# EAGLE board OpenSnake-Panel (EAGLE 9.6.2)
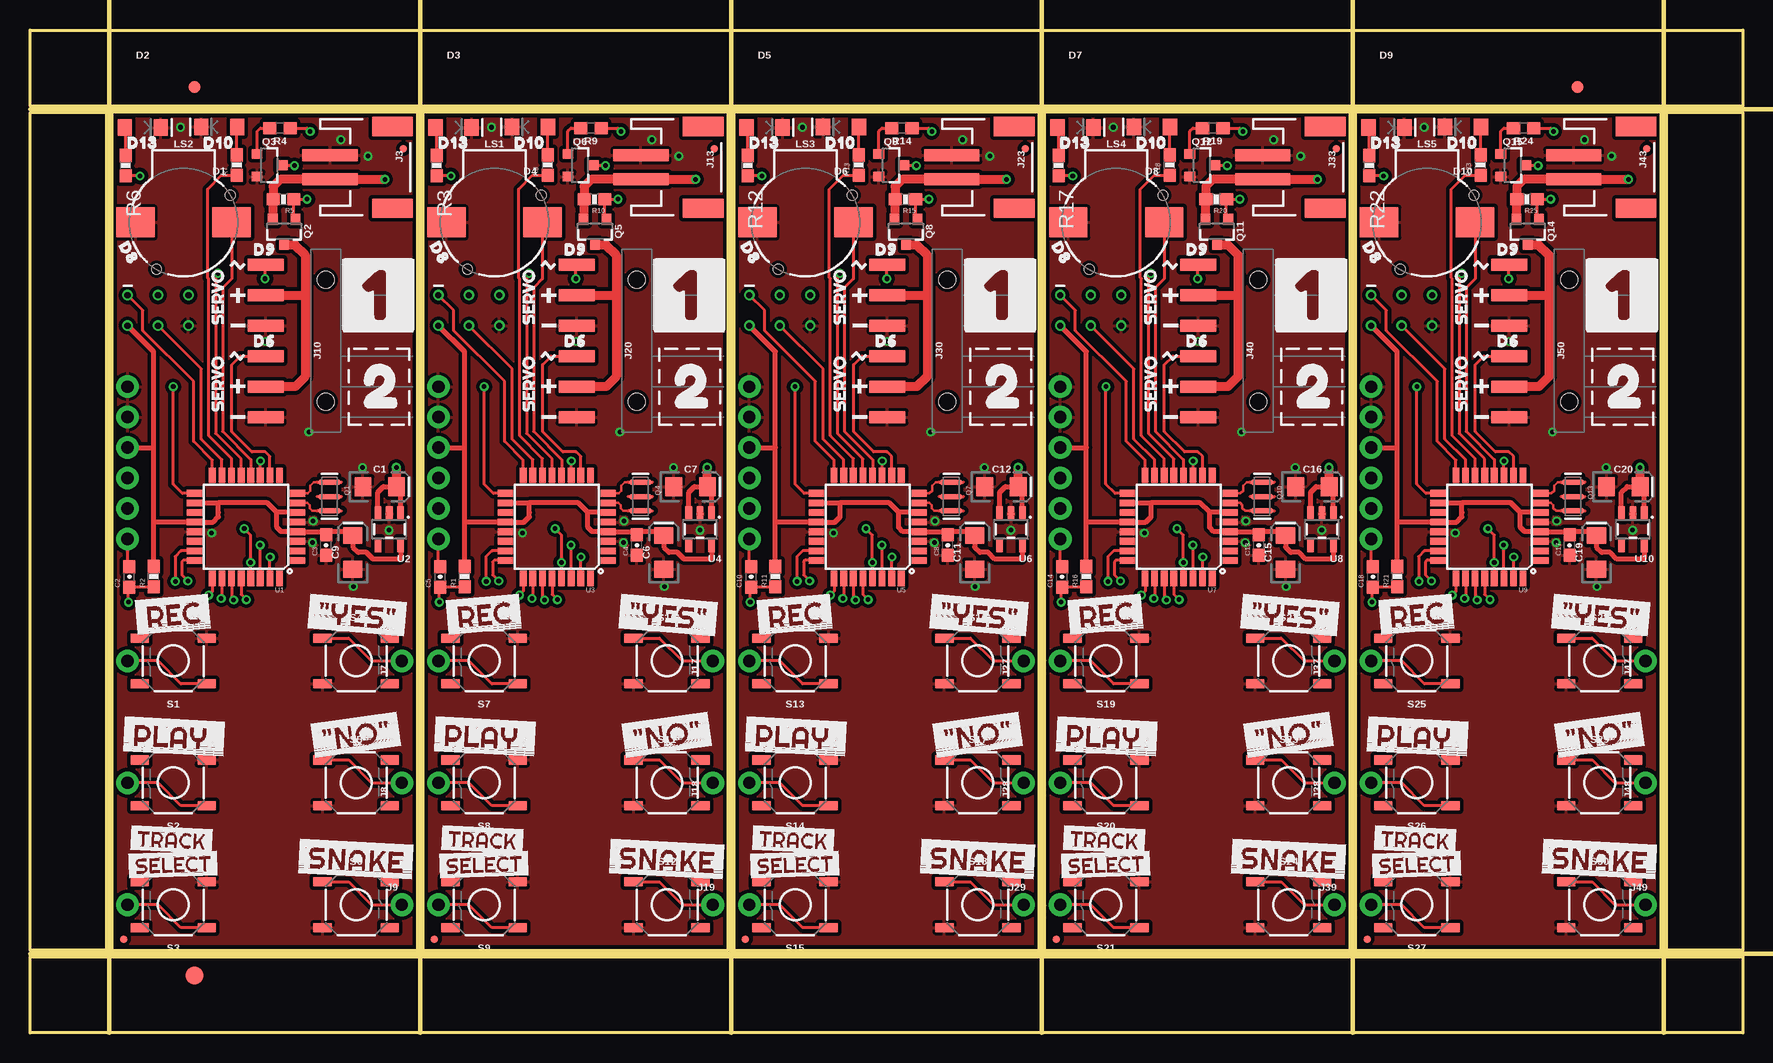
[diagram p0: board, top side]
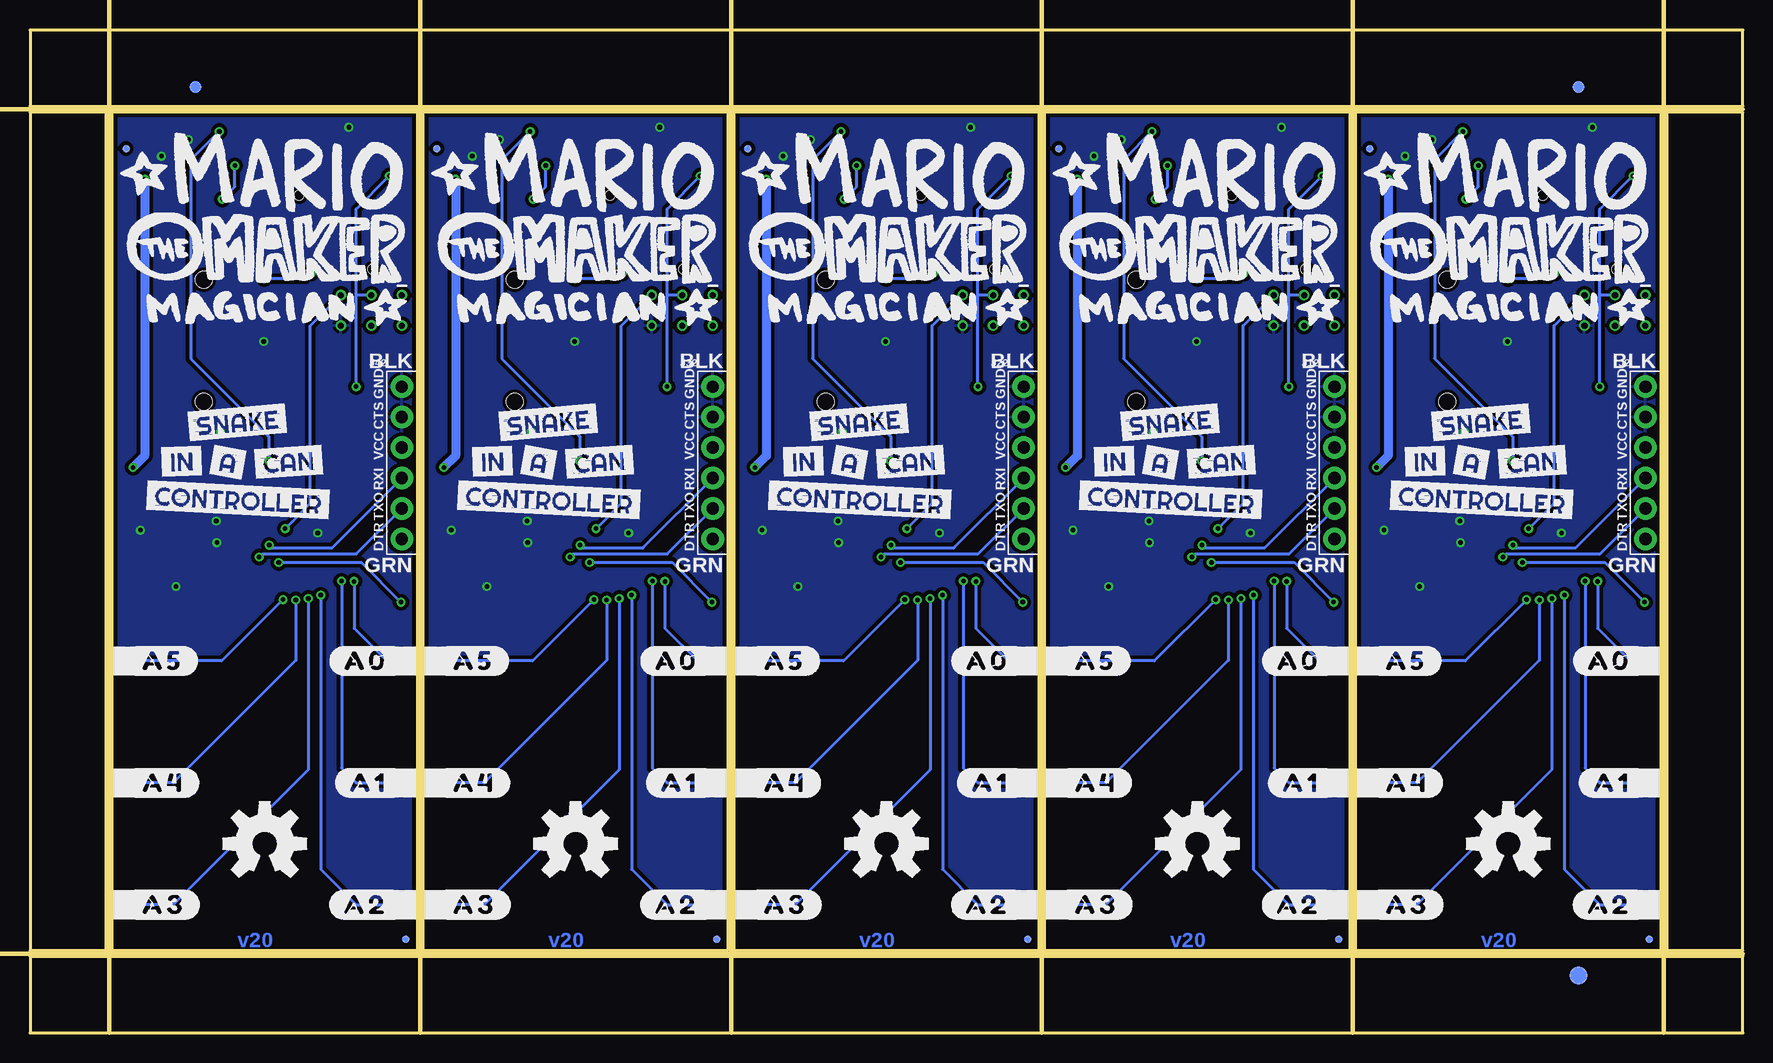
[diagram p1: board, bottom side, seen from below]

Size 142.75 x 83.57 mm. Coordinates in mm from the lower left corner, seen from the top.
Outline: 6.86,6.86 6.86,76.71 32.26,76.71 32.26,6.86 6.86,6.86
Outline: 32.77,6.86 32.77,76.71 58.17,76.71 58.17,6.86 32.77,6.86
Outline: 58.67,6.86 58.67,76.71 84.07,76.71 84.07,6.86 58.67,6.86
Outline: 84.58,6.86 84.58,76.71 109.98,76.71 109.98,6.86 84.58,6.86
Outline: 110.49,6.86 110.49,76.71 135.89,76.71 135.89,6.86 110.49,6.86
Outline: 0,6.35 142.75,6.35 142.75,0 0,0 0,6.35
Outline: 136.4,76.71 142.75,76.71 142.75,6.86 136.4,6.86 136.4,76.71
Outline: 0,83.57 142.75,83.57 142.75,77.22 0,77.22 0,83.57
Outline: 0,76.71 6.35,76.71 6.35,6.86 0,6.86 0,76.71
Copper layers (1*16): Top 0.035mm / dielectric 1.5mm / Bottom 0.035mm
Design rules "OpenSnake": minimum track width 7mil, minimum drill 15mil, track to track 7mil, track to pad 7mil, pad to pad 7mil, via to via 7mil, smd to smd 7mil, copper to edge 7mil, drill to drill 7mil, minimum pad ring 7mil, minimum via ring 7mil, stop-mask expansion 4mil, vias tented up to drill 25mil, thermal gap 10mil
Net classes: 1 vcc: width 0.203 mm
Milling: 8 lines

## Footprints (pad centres in the part's own frame; a part is rotated, then mirrored left to right if it is on the bottom)
EIA3216 = smd 1.4 x 1.6: + 1.4,0; - -1.4,0
0603-CAP = smd 1.1 x 1: 1 -0.85,0; 2 0.85,0
LED-1206 = smd 1.2 x 1.4: A -1.5,0; C 1.5,0
FIDUCIAL-1X2 = smd 1 x 1: 1 0,0
FIDUCIAL-1.5X3 = smd 1.5 x 1.5: 1 0,0
FIDUCIAL-MICRO = smd 0.635 x 0.635: 1 0,0
6_PIN_SERIAL_TARGET_SIDE_W_SILK = drill 1.016 pad 1.88: P$1 -6.35,0; P$2 -3.81,0; P$3 -1.27,0; P$4 1.27,0; P$5 3.81,0; P$6 6.35,0
2X3_TEST_POINTS = drill 0.508: 1 -2.54,-1.27; 2 -2.54,1.27; 3 0,-1.27; 4 0,1.27; 5 2.54,-1.27; 6 2.54,1.27
JST-2-SMD = smd 1 x 4.6: 1 -1,-3.7; 2 1,-3.7 | smd 1.6 x 3.4: NC1 -3.4,1.5; NC2 3.4,1.5
1X01_NO_SILK = drill 1.016 pad 1.88: 1 0,0
1X06-SMD_RA_MALE = smd 1 x 3: 1 -6.35,5; 2 -3.81,5; 3 -1.27,5; 4 1.27,5; 5 3.81,5; 6 6.35,5 | hole 1.4: -5.08,0; 5.08,0
BUZZER-CCV = smd 3.2 x 2.5: + 4,0; - -4,0 | hole 0.8: -3.9,-2.25; 2.25,3.9
RESONATOR-SMD = smd 0.45 x 1.905: 1 -1.2,0; 2 0,0; 3 1.2,0
SOT23-3 = smd 0.8 x 0.9: 1 -0.95,-1; 2 0.95,-1; 3 0,1.1
0603-RES = smd 1.1 x 1: 1 -0.85,0; 2 0.85,0
0603 = smd 1.1 x 1: 1 -0.85,0; 2 0.85,0
TACTILE_SWITCH_SMD_5.2MM = smd 1.524 x 0.762: 1 -2.794,1.905; 2 2.794,1.905; 3 -2.794,-1.905; 4 2.794,-1.905
TQFP32-08 = smd 1.27 x 0.559: 1 -4.293,2.8; 2 -4.293,2; 3 -4.293,1.2; 4 -4.293,0.4; 5 -4.293,-0.4; 6 -4.293,-1.2; 7 -4.293,-2; 8 -4.293,-2.8; 17 4.293,-2.8; 18 4.293,-2; 19 4.293,-1.2; 20 4.293,-0.4; 21 4.293,0.4; 22 4.293,1.2; 23 4.293,2; 24 4.293,2.8 | smd 0.559 x 1.27: 9 -2.8,-4.293; 10 -2,-4.293; 11 -1.2,-4.293; 12 -0.4,-4.293; 13 0.4,-4.293; 14 1.2,-4.293; 15 2,-4.293; 16 2.8,-4.293; 25 2.8,4.293; 26 2,4.293; 27 1.2,4.293; 28 0.4,4.293; 29 -0.4,4.293; 30 -1.2,4.293; 31 -2,4.293; 32 -2.8,4.293
SOT23-5 = smd 0.55 x 1.2: 1 -0.95,-1.3; 2 0,-1.3; 3 0.95,-1.3; 4 0.95,1.3; 5 -0.95,1.3

## Placement (x,y rotation side)
C1  10uF  [EIA3216]  29.15,45.51 0 top
C2  0.1uF  [0603-CAP]  8.28,37.99 90 top
C3  0.1uF  [0603-CAP]  24.67,40.65 90 top
C4  0.1uF  [0603-CAP]  50.58,40.65 90 top
C5  0.1uF  [0603-CAP]  34.19,37.99 90 top
C6  10uF  [EIA3216]  52.81,40.04 90 top
C7  10uF  [EIA3216]  55.05,45.51 0 top
C8  0.1uF  [0603-CAP]  76.49,40.65 90 top
C9  10uF  [EIA3216]  26.91,40.04 90 top
C10  0.1uF  [0603-CAP]  60.1,37.99 90 top
C11  10uF  [EIA3216]  78.72,40.04 90 top
C12  10uF  [EIA3216]  80.96,45.51 0 top
C13  0.1uF  [0603-CAP]  102.39,40.65 90 top
C14  0.1uF  [0603-CAP]  86.01,37.99 90 top
C15  10uF  [EIA3216]  104.63,40.04 90 top
C16  10uF  [EIA3216]  106.87,45.51 0 top
C17  0.1uF  [0603-CAP]  128.3,40.65 90 top
C18  0.1uF  [0603-CAP]  111.91,37.99 90 top
C19  10uF  [EIA3216]  130.54,40.04 90 top
C20  10uF  [EIA3216]  132.78,45.51 0 top
D1  GREEN  [LED-1206]  15.77,75.49 180 top
D2  RED  [LED-1206]  9.4,75.44 0 top
D3  RED  [LED-1206]  35.31,75.44 0 top
D4  GREEN  [LED-1206]  41.68,75.49 180 top
D5  RED  [LED-1206]  61.21,75.44 0 top
D6  GREEN  [LED-1206]  67.59,75.49 180 top
D7  RED  [LED-1206]  87.12,75.44 0 top
D8  GREEN  [LED-1206]  93.5,75.49 180 top
D9  RED  [LED-1206]  113.03,75.44 0 top
D10  GREEN  [LED-1206]  119.41,75.49 180 top
E$1  [FIDUCIAL-1X2]  13.72,78.8 0 top
E$2  [FIDUCIAL-1X2]  13.72,78.8 0 bottom
E$3  [FIDUCIAL-1X2]  128.97,78.8 0 top
E$4  [FIDUCIAL-1X2]  128.97,78.8 0 bottom
E$5  [FIDUCIAL-1.5X3]  13.72,4.76 0 top
E$6  [FIDUCIAL-1.5X3]  13.72,4.76 0 bottom
FD1  FIDUCIALUFIDUCIAL  [FIDUCIAL-MICRO]  31.12,73.69 0 top
FD2  FIDUCIALUFIDUCIAL  [FIDUCIAL-MICRO]  31.12,73.69 0 bottom
FD3  FIDUCIALUFIDUCIAL  [FIDUCIAL-MICRO]  7.8,7.8 0 top
FD4  FIDUCIALUFIDUCIAL  [FIDUCIAL-MICRO]  7.8,7.8 0 bottom
FD5  FIDUCIALUFIDUCIAL  [FIDUCIAL-MICRO]  57.02,73.69 0 top
FD6  FIDUCIALUFIDUCIAL  [FIDUCIAL-MICRO]  57.02,73.69 0 bottom
FD7  FIDUCIALUFIDUCIAL  [FIDUCIAL-MICRO]  33.71,7.8 0 top
FD8  FIDUCIALUFIDUCIAL  [FIDUCIAL-MICRO]  33.71,7.8 0 bottom
FD9  FIDUCIALUFIDUCIAL  [FIDUCIAL-MICRO]  82.93,73.69 0 top
FD10  FIDUCIALUFIDUCIAL  [FIDUCIAL-MICRO]  82.93,73.69 0 bottom
FD11  FIDUCIALUFIDUCIAL  [FIDUCIAL-MICRO]  59.61,7.8 0 top
FD12  FIDUCIALUFIDUCIAL  [FIDUCIAL-MICRO]  59.61,7.8 0 bottom
FD13  FIDUCIALUFIDUCIAL  [FIDUCIAL-MICRO]  108.84,73.69 0 top
FD14  FIDUCIALUFIDUCIAL  [FIDUCIAL-MICRO]  108.84,73.69 0 bottom
FD15  FIDUCIALUFIDUCIAL  [FIDUCIAL-MICRO]  85.52,7.8 0 top
FD16  FIDUCIALUFIDUCIAL  [FIDUCIAL-MICRO]  85.52,7.8 0 bottom
FD17  FIDUCIALUFIDUCIAL  [FIDUCIAL-MICRO]  134.75,73.69 0 top
FD18  FIDUCIALUFIDUCIAL  [FIDUCIAL-MICRO]  134.75,73.69 0 bottom
FD19  FIDUCIALUFIDUCIAL  [FIDUCIAL-MICRO]  111.43,7.8 0 top
FD20  FIDUCIALUFIDUCIAL  [FIDUCIAL-MICRO]  111.43,7.8 0 bottom
J1  [6_PIN_SERIAL_TARGET_SIDE_W_SILK]  8.13,47.5 90 bottom
J2  SPI  [2X3_TEST_POINTS]  10.67,60.2 180 bottom
J3  [JST-2-SMD]  28.7,72.12 270 top
J4  [1X01_NO_SILK]  8.13,30.99 90 top
J5  [1X01_NO_SILK]  8.13,20.83 90 top
J6  [1X01_NO_SILK]  8.13,10.67 90 top
J7  [1X01_NO_SILK]  30.99,30.99 90 top
J8  [1X01_NO_SILK]  30.99,20.83 90 top
J9  [1X01_NO_SILK]  30.99,10.67 0 top
J10  RA 6Pin SMD  [1X06-SMD_RA_MALE]  24.64,57.66 90 top
J11  [6_PIN_SERIAL_TARGET_SIDE_W_SILK]  34.04,47.5 90 bottom
J12  SPI  [2X3_TEST_POINTS]  36.58,60.2 180 bottom
J13  [JST-2-SMD]  54.61,72.12 270 top
J14  [1X01_NO_SILK]  34.04,30.99 90 top
J15  [1X01_NO_SILK]  34.04,20.83 90 top
J16  [1X01_NO_SILK]  34.04,10.67 90 top
J17  [1X01_NO_SILK]  56.9,30.99 90 top
J18  [1X01_NO_SILK]  56.9,20.83 90 top
J19  [1X01_NO_SILK]  56.9,10.67 0 top
J20  RA 6Pin SMD  [1X06-SMD_RA_MALE]  50.55,57.66 90 top
J21  [6_PIN_SERIAL_TARGET_SIDE_W_SILK]  59.94,47.5 90 bottom
J22  SPI  [2X3_TEST_POINTS]  62.48,60.2 180 bottom
J23  [JST-2-SMD]  80.52,72.12 270 top
J24  [1X01_NO_SILK]  59.94,30.99 90 top
J25  [1X01_NO_SILK]  59.94,20.83 90 top
J26  [1X01_NO_SILK]  59.94,10.67 90 top
J27  [1X01_NO_SILK]  82.8,30.99 90 top
J28  [1X01_NO_SILK]  82.8,20.83 90 top
J29  [1X01_NO_SILK]  82.8,10.67 0 top
J30  RA 6Pin SMD  [1X06-SMD_RA_MALE]  76.45,57.66 90 top
J31  [6_PIN_SERIAL_TARGET_SIDE_W_SILK]  85.85,47.5 90 bottom
J32  SPI  [2X3_TEST_POINTS]  88.39,60.2 180 bottom
J33  [JST-2-SMD]  106.43,72.12 270 top
J34  [1X01_NO_SILK]  85.85,30.99 90 top
J35  [1X01_NO_SILK]  85.85,20.83 90 top
J36  [1X01_NO_SILK]  85.85,10.67 90 top
J37  [1X01_NO_SILK]  108.71,30.99 90 top
J38  [1X01_NO_SILK]  108.71,20.83 90 top
J39  [1X01_NO_SILK]  108.71,10.67 0 top
J40  RA 6Pin SMD  [1X06-SMD_RA_MALE]  102.36,57.66 90 top
J41  [6_PIN_SERIAL_TARGET_SIDE_W_SILK]  111.76,47.5 90 bottom
J42  SPI  [2X3_TEST_POINTS]  114.3,60.2 180 bottom
J43  [JST-2-SMD]  132.33,72.12 270 top
J44  [1X01_NO_SILK]  111.76,30.99 90 top
J45  [1X01_NO_SILK]  111.76,20.83 90 top
J46  [1X01_NO_SILK]  111.76,10.67 90 top
J47  [1X01_NO_SILK]  134.62,30.99 90 top
J48  [1X01_NO_SILK]  134.62,20.83 90 top
J49  [1X01_NO_SILK]  134.62,10.67 0 top
J50  RA 6Pin SMD  [1X06-SMD_RA_MALE]  128.27,57.66 90 top
LOGO1  OSHW-LOGOL  [OSHW-LOGO-L]  19.56,15.75 0 bottom
LOGO2  OSHW-LOGOL  [OSHW-LOGO-L]  45.47,15.75 0 bottom
LOGO3  OSHW-LOGOL  [OSHW-LOGO-L]  71.37,15.75 0 bottom
LOGO4  OSHW-LOGOL  [OSHW-LOGO-L]  97.28,15.75 0 bottom
LOGO5  OSHW-LOGOL  [OSHW-LOGO-L]  123.19,15.75 0 bottom
LS1  BUZZER  [BUZZER-CCV]  38.7,67.54 180 top
LS2  BUZZER  [BUZZER-CCV]  12.79,67.54 180 top
LS3  BUZZER  [BUZZER-CCV]  64.61,67.54 180 top
LS4  BUZZER  [BUZZER-CCV]  90.52,67.54 180 top
LS5  BUZZER  [BUZZER-CCV]  116.43,67.54 180 top
Q1  16MHZ  [RESONATOR-SMD]  24.95,44.69 270 top
Q2  20V/4.2A/52mΩ/1.4W  [SOT23-3]  21.18,66.78 180 top
Q3  600mA/40V  [SOT23-3]  19.92,72.29 270 top
Q4  16MHZ  [RESONATOR-SMD]  50.86,44.69 270 top
Q5  20V/4.2A/52mΩ/1.4W  [SOT23-3]  47.09,66.78 180 top
Q6  600mA/40V  [SOT23-3]  45.83,72.29 270 top
Q7  16MHZ  [RESONATOR-SMD]  76.77,44.69 270 top
Q8  20V/4.2A/52mΩ/1.4W  [SOT23-3]  73,66.78 180 top
Q9  600mA/40V  [SOT23-3]  71.74,72.29 270 top
Q10  16MHZ  [RESONATOR-SMD]  102.68,44.69 270 top
Q11  20V/4.2A/52mΩ/1.4W  [SOT23-3]  98.91,66.78 180 top
Q12  600mA/40V  [SOT23-3]  97.65,72.29 270 top
Q13  16MHZ  [RESONATOR-SMD]  128.58,44.69 270 top
Q14  20V/4.2A/52mΩ/1.4W  [SOT23-3]  124.81,66.78 180 top
Q15  600mA/40V  [SOT23-3]  123.56,72.29 270 top
R1  10K  [0603-RES]  36.21,38.01 90 top
R2  10K  [0603-RES]  10.3,38.01 90 top
R3  330  [0603-RES]  33.89,72.26 90 top
R4  100  [0603]  20.84,75.38 180 top
R5  10K  [0603-RES]  21.13,69.45 180 top
R6  330  [0603-RES]  7.99,72.26 90 top
R7  330  [0603-RES]  17.25,72.3 90 top
R8  330  [0603-RES]  43.15,72.3 90 top
R9  100  [0603]  46.74,75.38 180 top
R10  10K  [0603-RES]  47.04,69.45 180 top
R11  10K  [0603-RES]  62.12,38.01 90 top
R12  330  [0603-RES]  59.8,72.26 90 top
R13  330  [0603-RES]  69.06,72.3 90 top
R14  100  [0603]  72.65,75.38 180 top
R15  10K  [0603-RES]  72.95,69.45 180 top
R16  10K  [0603-RES]  88.03,38.01 90 top
R17  330  [0603-RES]  85.71,72.26 90 top
R18  330  [0603-RES]  94.97,72.3 90 top
R19  100  [0603]  98.56,75.38 180 top
R20  10K  [0603-RES]  98.85,69.45 180 top
R21  10K  [0603-RES]  113.93,38.01 90 top
R22  330  [0603-RES]  111.62,72.26 90 top
R23  330  [0603-RES]  120.88,72.3 90 top
R24  100  [0603]  124.47,75.38 180 top
R25  10K  [0603-RES]  124.76,69.45 180 top
S1  [TACTILE_SWITCH_SMD_5.2MM]  11.94,30.99 180 top
S2  [TACTILE_SWITCH_SMD_5.2MM]  11.94,20.83 180 top
S3  [TACTILE_SWITCH_SMD_5.2MM]  11.94,10.67 180 top
S4  [TACTILE_SWITCH_SMD_5.2MM]  27.18,30.99 0 top
S5  [TACTILE_SWITCH_SMD_5.2MM]  27.18,20.83 0 top
S6  [TACTILE_SWITCH_SMD_5.2MM]  27.18,10.67 0 top
S7  [TACTILE_SWITCH_SMD_5.2MM]  37.85,30.99 180 top
S8  [TACTILE_SWITCH_SMD_5.2MM]  37.85,20.83 180 top
S9  [TACTILE_SWITCH_SMD_5.2MM]  37.85,10.67 180 top
S10  [TACTILE_SWITCH_SMD_5.2MM]  53.09,30.99 0 top
S11  [TACTILE_SWITCH_SMD_5.2MM]  53.09,20.83 0 top
S12  [TACTILE_SWITCH_SMD_5.2MM]  53.09,10.67 0 top
S13  [TACTILE_SWITCH_SMD_5.2MM]  63.75,30.99 180 top
S14  [TACTILE_SWITCH_SMD_5.2MM]  63.75,20.83 180 top
S15  [TACTILE_SWITCH_SMD_5.2MM]  63.75,10.67 180 top
S16  [TACTILE_SWITCH_SMD_5.2MM]  78.99,30.99 0 top
S17  [TACTILE_SWITCH_SMD_5.2MM]  78.99,20.83 0 top
S18  [TACTILE_SWITCH_SMD_5.2MM]  78.99,10.67 0 top
S19  [TACTILE_SWITCH_SMD_5.2MM]  89.66,30.99 180 top
S20  [TACTILE_SWITCH_SMD_5.2MM]  89.66,20.83 180 top
S21  [TACTILE_SWITCH_SMD_5.2MM]  89.66,10.67 180 top
S22  [TACTILE_SWITCH_SMD_5.2MM]  104.9,30.99 0 top
S23  [TACTILE_SWITCH_SMD_5.2MM]  104.9,20.83 0 top
S24  [TACTILE_SWITCH_SMD_5.2MM]  104.9,10.67 0 top
S25  [TACTILE_SWITCH_SMD_5.2MM]  115.57,30.99 180 top
S26  [TACTILE_SWITCH_SMD_5.2MM]  115.57,20.83 180 top
S27  [TACTILE_SWITCH_SMD_5.2MM]  115.57,10.67 180 top
S28  [TACTILE_SWITCH_SMD_5.2MM]  130.81,30.99 0 top
S29  [TACTILE_SWITCH_SMD_5.2MM]  130.81,20.83 0 top
S30  [TACTILE_SWITCH_SMD_5.2MM]  130.81,10.67 0 top
U1  ATMEGA328P  [TQFP32-08]  18,42.16 180 top
U2  5V  [SOT23-5]  29.94,41.96 180 top
U3  ATMEGA328P  [TQFP32-08]  43.9,42.16 180 top
U4  5V  [SOT23-5]  55.85,41.96 180 top
U5  ATMEGA328P  [TQFP32-08]  69.81,42.16 180 top
U6  5V  [SOT23-5]  81.75,41.96 180 top
U7  ATMEGA328P  [TQFP32-08]  95.72,42.16 180 top
U8  5V  [SOT23-5]  107.66,41.96 180 top
U9  ATMEGA328P  [TQFP32-08]  121.63,42.16 180 top
U10  5V  [SOT23-5]  133.57,41.96 180 top
U$1  [#A0#0]  8.13,30.99 0 bottom
U$2  [#YES#0]  22.42,35.23 355 top
U$3  [#NO#1]  22.75,24.22 8 top
U$4  [SNAKE2]  21.6,14.76 357 top
U$5  [MARIO_LOGO]  32.26,57.91 0 bottom
U$6  [#A1#0]  8.13,20.83 0 bottom
U$7  [#A2#0]  8.13,10.67 0 bottom
U$8  [SERVO2]  15.61,58.08 90 top
U$9  [#A3#0]  30.99,10.67 0 bottom
U$10  [#A4#0]  30.99,20.83 0 bottom
U$11  [#1]  15.31,61.66 0 top
U$12  [#1]  15.31,54.09 0 top
U$13  [SERVO2]  15.61,50.85 90 top
U$14  [SNAKE0]  26.59,50.47 5 bottom
U$15  [CONTROLLER4]  30.08,44.85 357 bottom
U$16  [IN1]  28.85,47.55 2 bottom
U$17  [#A5#0]  30.99,30.99 0 bottom
U$18  [D90]  19.56,65.28 0 top
U$19  [REC0]  8.03,34.54 5 top
U$20  [PLAY_1]  6.93,24.97 357 top
U$21  [TRACK2]  7.82,16.31 357 top
U$22  [SELECT3]  7.59,13.88 2 top
U$23  [A2]  24.66,47.9 350 bottom
U$24  [CAN3]  21.36,47.32 4 bottom
U$25  [D60]  19.56,57.66 0 top
U$26  [D100]  15.75,74.17 0 top
U$27  [D130]  9.4,74.17 0 top
U$28  [D80]  8.23,64.98 300 top
U$29  [#1#0]  24.51,61.47 0 top
U$30  [#YES#0]  48.33,35.23 355 top
U$31  [2_0]  30.1,53.85 0 top
U$32  [#NO#1]  48.66,24.22 8 top
U$33  [SNAKE2]  47.5,14.76 357 top
U$34  [REC0]  33.93,34.54 5 top
U$35  [PLAY_1]  32.84,24.97 357 top
U$36  [TRACK2]  33.73,16.31 357 top
U$37  [SELECT3]  33.5,13.88 2 top
U$38  [MARIO_LOGO]  58.17,57.91 0 bottom
U$39  [#1]  41.22,61.66 0 top
U$40  [#1]  41.22,54.09 0 top
U$41  [SERVO2]  41.52,58.08 90 top
U$42  [SERVO2]  41.52,50.85 90 top
U$43  [SNAKE0]  52.5,50.47 5 bottom
U$44  [IN1]  54.76,47.55 2 bottom
U$45  [A2]  50.57,47.9 350 bottom
U$46  [CAN3]  47.27,47.32 4 bottom
U$47  [CONTROLLER4]  55.99,44.85 357 bottom
U$48  [#A0#0]  34.04,30.99 0 bottom
U$49  [#A1#0]  34.04,20.83 0 bottom
U$50  [#A2#0]  34.04,10.67 0 bottom
U$51  [#A3#0]  56.9,10.67 0 bottom
U$52  [#A4#0]  56.9,20.83 0 bottom
U$53  [#A5#0]  56.9,30.99 0 bottom
U$54  [D90]  45.47,65.28 0 top
U$55  [D60]  45.47,57.66 0 top
U$56  [D100]  41.66,74.17 0 top
U$57  [D130]  35.31,74.17 0 top
U$58  [D80]  34.14,64.98 300 top
U$59  [#1#0]  50.42,61.47 0 top
U$60  [2_0]  56.01,53.85 0 top
U$61  [#YES#0]  74.24,35.23 355 top
U$62  [#NO#1]  74.56,24.22 8 top
U$63  [SNAKE2]  73.41,14.76 357 top
U$64  [REC0]  59.84,34.54 5 top
U$65  [PLAY_1]  58.75,24.97 357 top
U$66  [TRACK2]  59.64,16.31 357 top
U$67  [SELECT3]  59.41,13.88 2 top
U$68  [MARIO_LOGO]  84.07,57.91 0 bottom
U$69  [#1]  67.13,61.66 0 top
U$70  [#1]  67.12,54.09 0 top
U$71  [SERVO2]  67.42,58.08 90 top
U$72  [SERVO2]  67.43,50.85 90 top
U$73  [SNAKE0]  78.41,50.47 5 bottom
U$74  [IN1]  80.67,47.55 2 bottom
U$75  [A2]  76.48,47.9 350 bottom
U$76  [CAN3]  73.18,47.32 4 bottom
U$77  [CONTROLLER4]  81.9,44.85 357 bottom
U$78  [#A0#0]  59.94,30.99 0 bottom
U$79  [#A1#0]  59.94,20.83 0 bottom
U$80  [#A2#0]  59.94,10.67 0 bottom
U$81  [#A3#0]  82.8,10.67 0 bottom
U$82  [#A4#0]  82.8,20.83 0 bottom
U$83  [#A5#0]  82.8,30.99 0 bottom
U$84  [D90]  71.37,65.28 0 top
U$85  [D60]  71.37,57.66 0 top
U$86  [D100]  67.56,74.17 0 top
U$87  [D130]  61.21,74.17 0 top
U$88  [D80]  60.05,64.98 300 top
U$89  [#1#0]  76.33,61.47 0 top
U$90  [2_0]  81.92,53.85 0 top
U$91  [#YES#0]  100.15,35.23 355 top
U$92  [#NO#1]  100.47,24.22 8 top
U$93  [SNAKE2]  99.32,14.76 357 top
U$94  [REC0]  85.75,34.54 5 top
U$95  [PLAY_1]  84.66,24.97 357 top
U$96  [TRACK2]  85.55,16.31 357 top
U$97  [SELECT3]  85.31,13.88 2 top
U$98  [MARIO_LOGO]  109.98,57.91 0 bottom
U$99  [#1]  93.04,61.66 0 top
U$100  [#1]  93.03,54.09 0 top
U$101  [SERVO2]  93.33,58.08 90 top
U$102  [SERVO2]  93.34,50.85 90 top
U$103  [SNAKE0]  104.32,50.47 5 bottom
U$104  [IN1]  106.58,47.55 2 bottom
U$105  [A2]  102.39,47.9 350 bottom
U$106  [CAN3]  99.09,47.32 4 bottom
U$107  [CONTROLLER4]  107.8,44.85 357 bottom
U$108  [#A0#0]  85.85,30.99 0 bottom
U$109  [#A1#0]  85.85,20.83 0 bottom
U$110  [#A2#0]  85.85,10.67 0 bottom
U$111  [#A3#0]  108.71,10.67 0 bottom
U$112  [#A4#0]  108.71,20.83 0 bottom
U$113  [#A5#0]  108.71,30.99 0 bottom
U$114  [D90]  97.28,65.28 0 top
U$115  [D60]  97.28,57.66 0 top
U$116  [D100]  93.47,74.17 0 top
U$117  [D130]  87.12,74.17 0 top
U$118  [D80]  85.96,64.98 300 top
U$119  [#1#0]  102.23,61.47 0 top
U$120  [2_0]  107.82,53.85 0 top
U$121  [#YES#0]  126.05,35.23 355 top
U$122  [#NO#1]  126.38,24.22 8 top
U$123  [SNAKE2]  125.23,14.76 357 top
U$124  [REC0]  111.66,34.54 5 top
U$125  [PLAY_1]  110.57,24.97 357 top
U$126  [TRACK2]  111.46,16.31 357 top
U$127  [SELECT3]  111.22,13.88 2 top
U$128  [MARIO_LOGO]  135.89,57.91 0 bottom
U$129  [#1]  118.94,61.66 0 top
U$130  [#1]  118.94,54.09 0 top
U$131  [SERVO2]  119.24,58.08 90 top
U$132  [SERVO2]  119.25,50.85 90 top
U$133  [SNAKE0]  130.23,50.47 5 bottom
U$134  [IN1]  132.49,47.55 2 bottom
U$135  [A2]  128.3,47.9 350 bottom
U$136  [CAN3]  124.99,47.32 4 bottom
U$137  [CONTROLLER4]  133.71,44.85 357 bottom
U$138  [#A0#0]  111.76,30.99 0 bottom
U$139  [#A1#0]  111.76,20.83 0 bottom
U$140  [#A2#0]  111.76,10.67 0 bottom
U$141  [#A3#0]  134.62,10.67 0 bottom
U$142  [#A4#0]  134.62,20.83 0 bottom
U$143  [#A5#0]  134.62,30.99 0 bottom
U$144  [D90]  123.19,65.28 0 top
U$145  [D60]  123.19,57.66 0 top
U$146  [D100]  119.38,74.17 0 top
U$147  [D130]  113.03,74.17 0 top
U$148  [D80]  111.87,64.98 300 top
U$149  [#1#0]  128.14,61.47 0 top
U$150  [2_0]  133.73,53.85 0 top

## Library data of the parts
C1 C6 C7 C9 C11 C12 C15 C16 C19 C20 = SparkFun-Capacitors; PROD_ID: CAP-00811
C2-C5 C8 C10 C13 C14 C17 C18 = SparkFun-Capacitors; PROD_ID: CAP-00810
D1 D4 D6 D8 D10 = SparkFun-LED; PROD_ID: DIO-00862
D2 D3 D5 D7 D9 = SparkFun-LED; PROD_ID: DIO-09912
E$1-E$4 FD1-FD20 LOGO1-LOGO5 = SparkFun-Aesthetics
E$5 E$6 = SparkFun-Retired
J1 J2 J4-J9 J11 J12 J14-J19 J21 J22 J24-J29 J31 J32 J34-J39 J41 J42 J44-J49 = SparkFun-Connectors
J3 J13 J23 J33 J43 = SparkFun-Connectors; PROD_ID: CONN-11443; SF_ID: PRT-08612
J10 J20 J30 J40 J50 = SparkFun-Connectors; PROD_ID: CONN-08971
LS1-LS5 = SparkFun-Electromechanical; PROD_ID: COMP-08568
Q1 Q4 Q7 Q10 Q13 = SparkFun-FreqCtrl; PROD_ID: XTAL-08900
Q2 Q5 Q8 Q11 Q14 = SparkFun-DiscreteSemi; PROD_ID: TRAN-14388
Q3 Q6 Q9 Q12 Q15 = SparkFun-DiscreteSemi; PROD_ID: TRANS-08049
R1 R2 R5 R10 R11 R15 R16 R20 R21 R25 = SparkFun-Resistors; PROD_ID: RES-00824
R3 R6-R8 R12 R13 R17 R18 R22 R23 = SparkFun-Resistors; PROD_ID: RES-00818
R4 R9 R14 R19 R24 = SparkFun-Resistors; PROD_ID: RES-07863
S1-S30 = SparkFun-Switches; PROD_ID: SWCH-14139
U1 U3 U5 U7 U9 = SparkFun-DigitalIC; PROD_ID: IC-09069
U2 U4 U6 U8 U10 = SparkFun-IC-Power; PROD_ID: VREG-00823
U$1 U$6 U$7 U$9 U$10 U$17 U$18 U$25-U$29 U$31 U$48-U$60 U$78-U$90 U$108-U$120 U$138-U$150 = output
U$2-U$4 U$30 U$32 U$33 U$61-U$63 U$91-U$93 U$121-U$123 = buzzard_labels
U$5 U$38 U$68 U$98 U$128 = snake
U$8 U$11-U$13 U$39-U$42 U$69-U$72 U$99-U$102 U$129-U$132 = buzzard_labels (6)
U$14-U$16 U$23 U$24 U$43-U$47 U$73-U$77 U$103-U$107 U$133-U$137 = buzzard_labels (7)
U$19-U$22 U$34-U$37 U$64-U$67 U$94-U$97 U$124-U$127 = buzzard_labels (2)

## Nets
!DTR: C2.2 J1.P$1
!DTR1: C5.2 J11.P$1
!DTR2: C10.2 J21.P$1
!DTR3: C14.2 J31.P$1
!DTR4: C18.2 J41.P$1
BUZZER: LS2.- U1.12
BUZZER1: LS1.- U3.12
BUZZER2: LS3.- U5.12
BUZZER3: LS4.- U7.12
BUZZER4: LS5.- U9.12
D1: U3.32
D2: U1.32
D3: U5.32
D4: U7.32
D5: U9.32
ENABLE_SERVO: R4.1 U1.11
ENABLE_SERVO1: R9.1 U3.11
ENABLE_SERVO2: R14.1 U5.11
ENABLE_SERVO3: R19.1 U7.11
ENABLE_SERVO4: R24.1 U9.11
GND [vcc]: C1.- C3.1 C9.- D1.C D2.C J1.P$5 J1.P$6 J2.6 J3.1 J10.1 J10.4 LS2.+ Q1.2 Q3.2 S1.3 S2.3 S3.3 S4.3 S5.3 S6.3 U1.3 U1.5 U1.21 U2.2
GND1 [vcc]: C4.1 C6.- C7.- D3.C D4.C J11.P$5 J11.P$6 J12.6 J13.1 J20.1 J20.4 LS1.+ Q4.2 Q6.2 S7.3 S8.3 S9.3 S10.3 S11.3 S12.3 U3.3 U3.5 U3.21 U4.2
GND2 [vcc]: C8.1 C11.- C12.- D5.C D6.C J21.P$5 J21.P$6 J22.6 J23.1 J30.1 J30.4 LS3.+ Q7.2 Q9.2 S13.3 S14.3 S15.3 S16.3 S17.3 S18.3 U5.3 U5.5 U5.21 U6.2
GND3 [vcc]: C13.1 C15.- C16.- D7.C D8.C J31.P$5 J31.P$6 J32.6 J33.1 J40.1 J40.4 LS4.+ Q10.2 Q12.2 S19.3 S20.3 S21.3 S22.3 S23.3 S24.3 U7.3 U7.5 U7.21 U8.2
GND4 [vcc]: C17.1 C19.- C20.- D9.C D10.C J41.P$5 J41.P$6 J42.6 J43.1 J50.1 J50.4 LS5.+ Q13.2 Q15.2 S25.3 S26.3 S27.3 S28.3 S29.3 S30.3 U9.3 U9.5 U9.21 U10.2
GRN_LED: R7.1 U1.14
GRN_LED1: R8.1 U3.14
GRN_LED2: R13.1 U5.14
GRN_LED3: R18.1 U7.14
GRN_LED4: R23.1 U9.14
MISO: J2.1 U1.16
MISO1: J12.1 U3.16
MISO2: J22.1 U5.16
MISO3: J32.1 U7.16
MISO4: J42.1 U9.16
MOSI: J2.4 U1.15
MOSI1: J12.4 U3.15
MOSI2: J22.4 U5.15
MOSI3: J32.4 U7.15
MOSI4: J42.4 U9.15
N$1: Q1.1 U1.8
N$2: Q1.3 U1.7
N$3: D3.A R3.2
N$4: Q3.1 R4.2
N$5: Q2.1 Q3.3 R5.1
N$6: J10.2 J10.5 Q2.3
N$7: D2.A R6.2
N$8: Q4.1 U3.8
N$9: Q4.3 U3.7
N$10: D1.A R7.2
N$11: J20.2 J20.5 Q5.3
N$12: D4.A R8.2
N$13: Q6.1 R9.2
N$14: Q5.1 Q6.3 R10.1
N$15: D5.A R12.2
N$16: Q7.1 U5.8
N$17: Q7.3 U5.7
N$18: J30.2 J30.5 Q8.3
N$19: D6.A R13.2
N$20: Q9.1 R14.2
N$21: Q8.1 Q9.3 R15.1
N$22: D7.A R17.2
N$23: Q10.1 U7.8
N$24: Q10.3 U7.7
N$25: J40.2 J40.5 Q11.3
N$26: D8.A R18.2
N$27: Q12.1 R19.2
N$28: Q11.1 Q12.3 R20.1
N$29: D9.A R22.2
N$30: Q13.1 U9.8
N$31: Q13.3 U9.7
N$32: J50.2 J50.5 Q14.3
N$33: D10.A R23.2
N$34: Q15.1 R24.2
N$35: Q14.1 Q15.3 R25.1
NO: J8.1 S5.1 U1.27
NO1: J18.1 S11.1 U3.27
NO2: J28.1 S17.1 U5.27
NO3: J38.1 S23.1 U7.27
NO4: J48.1 S29.1 U9.27
PLAY: J5.1 S2.1 U1.24
PLAY1: J15.1 S8.1 U3.24
PLAY2: J25.1 S14.1 U5.24
PLAY3: J35.1 S20.1 U7.24
PLAY4: J45.1 S26.1 U9.24
REC: J4.1 S1.1 U1.23
REC1: J14.1 S7.1 U3.23
REC2: J24.1 S13.1 U5.23
REC3: J34.1 S19.1 U7.23
REC4: J44.1 S25.1 U9.23
RST: C2.1 J2.5 R2.1 U1.29
RST1: C5.1 J12.5 R1.1 U3.29
RST2: C10.1 J22.5 R11.1 U5.29
RST3: C14.1 J32.5 R16.1 U7.29
RST4: C18.1 J42.5 R21.1 U9.29
RX: J1.P$3 U1.30
RX1: J11.P$3 U3.30
RX2: J21.P$3 U5.30
RX3: J31.P$3 U7.30
RX4: J41.P$3 U9.30
SCK: J2.3 R6.1 U1.17
SCK1: J12.3 R3.1 U3.17
SCK2: J22.3 R12.1 U5.17
SCK3: J32.3 R17.1 U7.17
SCK4: J42.3 R22.1 U9.17
SERVO_1: J10.6 U1.13
SERVO_2: J10.3 U1.10
SERVO_3: J20.6 U3.13
SERVO_4: J20.3 U3.10
SERVO_5: J30.6 U5.13
SERVO_6: J30.3 U5.10
SERVO_7: J40.6 U7.13
SERVO_8: J40.3 U7.10
SERVO_9: J50.6 U9.13
SERVO_10: J50.3 U9.10
SNAKE: J9.1 S6.1 U1.26
SNAKE1: J19.1 S12.1 U3.26
SNAKE2: J29.1 S18.1 U5.26
SNAKE3: J39.1 S24.1 U7.26
SNAKE4: J49.1 S30.1 U9.26
TRCK_SEL: J6.1 S3.1 U1.25
TRCK_SEL1: J16.1 S9.1 U3.25
TRCK_SEL2: J26.1 S15.1 U5.25
TRCK_SEL3: J36.1 S21.1 U7.25
TRCK_SEL4: J46.1 S27.1 U9.25
TX: J1.P$2 U1.31
TX1: J11.P$2 U3.31
TX2: J21.P$2 U5.31
TX3: J31.P$2 U7.31
TX4: J41.P$2 U9.31
VBAT: C1.+ J3.2 Q2.2 R5.2 U2.1 U2.3
VBAT1: C7.+ J13.2 Q5.2 R10.2 U4.1 U4.3
VBAT2: C12.+ J23.2 Q8.2 R15.2 U6.1 U6.3
VBAT3: C16.+ J33.2 Q11.2 R20.2 U8.1 U8.3
VBAT4: C20.+ J43.2 Q14.2 R25.2 U10.1 U10.3
VCC: C3.2 C9.+ J1.P$4 J2.2 R2.2 U1.4 U1.6 U1.18 U1.20 U2.5
VCC1: C4.2 C6.+ J11.P$4 J12.2 R1.2 U3.4 U3.6 U3.18 U3.20 U4.5
VCC2: C8.2 C11.+ J21.P$4 J22.2 R11.2 U5.4 U5.6 U5.18 U5.20 U6.5
VCC3: C13.2 C15.+ J31.P$4 J32.2 R16.2 U7.4 U7.6 U7.18 U7.20 U8.5
VCC4: C17.2 C19.+ J41.P$4 J42.2 R21.2 U9.4 U9.6 U9.18 U9.20 U10.5
YES: J7.1 S4.1 U1.28
YES1: J17.1 S10.1 U3.28
YES2: J27.1 S16.1 U5.28
YES3: J37.1 S22.1 U7.28
YES4: J47.1 S28.1 U9.28

## Tracks (layer width: path | path; a pad name or v marks a point on that pad's centre or on a via)
!DTR
  Top 0.254: C2.2 8.13,39 J1.P$1
!DTR1
  Top 0.254: C5.2 34.04,39 J11.P$1
!DTR2
  Top 0.254: C10.2 59.94,39 J21.P$1
!DTR3
  Top 0.254: C14.2 85.85,39 J31.P$1
!DTR4
  Top 0.254: C18.2 111.76,39 J41.P$1
BUZZER
  Top 0.254: U1.12 18.4,47.77 16.05,50.11 16.05,62.08 16.79,62.82 LS2.-
BUZZER1
  Top 0.254: U3.12 44.3,47.77 41.96,50.11 41.96,62.08 42.7,62.82 LS1.-
BUZZER2
  Top 0.254: U5.12 70.21,47.77 67.87,50.11 67.87,62.08 68.61,62.82 LS3.-
BUZZER3
  Top 0.254: U7.12 96.12,47.77 93.78,50.11 93.78,62.08 94.52,62.82 LS4.-
BUZZER4
  Top 0.254: U9.12 122.03,47.77 119.69,50.11 119.69,62.08 120.43,62.82 LS5.-
ENABLE_SERVO  (via drill 0.38)
  Top 0.254: R4.1 23.07,75.38 v23.34,75.11 | U1.11 v19.2,47.64 v19.2,47.65
  Bottom 0.254: v23.34,75.11 25.71,72.75 25.71,56.18 19.2,49.68 v19.2,47.65
ENABLE_SERVO1  (via drill 0.38)
  Top 0.254: R9.1 48.98,75.38 v49.25,75.11 | U3.11 v45.1,47.64 v45.11,47.65
  Bottom 0.254: v49.25,75.11 51.61,72.75 51.61,56.18 45.11,49.68 v45.11,47.65
ENABLE_SERVO2  (via drill 0.38)
  Top 0.254: R14.1 74.89,75.38 v75.16,75.11 | U5.11 v71.01,47.64 v71.02,47.65
  Bottom 0.254: v75.16,75.11 77.52,72.75 77.52,56.18 71.02,49.68 v71.02,47.65
ENABLE_SERVO3  (via drill 0.38)
  Top 0.254: R19.1 100.8,75.38 v101.07,75.11 | U7.11 v96.92,47.64 v96.93,47.65
  Bottom 0.254: v101.07,75.11 103.43,72.75 103.43,56.18 96.93,49.68 v96.93,47.65
ENABLE_SERVO4  (via drill 0.38)
  Top 0.254: R24.1 126.7,75.38 v126.98,75.11 | U9.11 v122.83,47.64 v122.83,47.65
  Bottom 0.254: v126.98,75.11 129.34,72.75 129.34,56.18 122.83,49.68 v122.83,47.65
GND  (via drill 0.38)
  other vias: 23.55,40.84 23.6,42.65 27.71,47.09 26.95,37.19 28.17,73.05 25.91,74.42 12.55,75.46 23.24,50.06 19.63,57.61 15.14,41.66 29.92,41.88
  pour Top (isolate 0.305): 6.86,6.86 6.86,76.71 32.26,76.71 32.26,6.86
  pour Bottom (isolate 0.305): 6.86,6.86 32.26,6.86 32.26,76.71 6.86,76.71
GND1  (via drill 0.38)
  other vias: 49.45,40.84 49.5,42.65 53.62,47.09 52.86,37.19 54.08,73.05 51.82,74.42 38.46,75.46 49.15,50.06 45.54,57.61 41.05,41.66 55.83,41.88
  pour Top (isolate 0.305): 32.77,6.86 32.77,76.71 58.17,76.71 58.17,6.86
  pour Bottom (isolate 0.305): 32.77,6.86 58.17,6.86 58.17,76.71 32.77,76.71
GND2  (via drill 0.38)
  other vias: 75.36,40.84 75.41,42.65 79.53,47.09 78.77,37.19 79.98,73.05 77.72,74.42 64.36,75.46 75.06,50.06 71.45,57.61 66.95,41.66 81.74,41.88
  pour Top (isolate 0.305): 58.67,6.86 58.67,76.71 84.07,76.71 84.07,6.86
  pour Bottom (isolate 0.305): 58.67,6.86 84.07,6.86 84.07,76.71 58.67,76.71
GND3  (via drill 0.38)
  other vias: 101.27,40.84 101.32,42.65 105.44,47.09 104.67,37.19 105.89,73.05 103.63,74.42 90.27,75.46 100.97,50.06 97.36,57.61 92.86,41.66 107.65,41.88
  pour Top (isolate 0.305): 84.58,6.86 84.58,76.71 109.98,76.71 109.98,6.86
  pour Bottom (isolate 0.305): 84.58,6.86 109.98,6.86 109.98,76.71 84.58,76.71
GND4  (via drill 0.38)
  other vias: 127.18,40.84 127.23,42.65 131.34,47.09 130.58,37.19 131.8,73.05 129.54,74.42 116.18,75.46 126.87,50.06 123.27,57.61 118.77,41.66 133.55,41.88
  pour Top (isolate 0.305): 110.49,6.86 110.49,76.71 135.89,76.71 135.89,6.86
  pour Bottom (isolate 0.305): 110.49,6.86 135.89,6.86 135.89,76.71 110.49,76.71
GRN_LED
  Top 0.254: U1.14 16.8,47.85 14.88,49.76 14.88,62.84 14.81,62.92 14.81,70.31 15.95,71.45 R7.1
GRN_LED1
  Top 0.254: U3.14 42.7,47.85 40.79,49.76 40.79,62.84 40.72,62.92 40.72,70.31 41.86,71.45 R8.1
GRN_LED2
  Top 0.254: U5.14 68.61,47.85 66.7,49.76 66.7,62.84 66.62,62.92 66.62,70.31 67.77,71.45 R13.1
GRN_LED3
  Top 0.254: U7.14 94.52,47.85 92.61,49.76 92.61,62.84 92.53,62.92 92.53,70.31 93.68,71.45 R18.1
GRN_LED4
  Top 0.254: U9.14 120.43,47.85 118.52,49.76 118.52,62.84 118.44,62.92 118.44,70.31 119.59,71.45 R23.1
MISO
  Top 0.254: U1.16 15.2,47.72 13.64,49.28 13.64,54.28 9.4,58.52 9.4,60.2 J2.1
MISO1
  Top 0.254: U3.16 41.1,47.72 39.55,49.28 39.55,54.28 35.31,58.52 35.31,60.2 J12.1
MISO2
  Top 0.254: U5.16 67.01,47.72 65.46,49.28 65.46,54.28 61.21,58.52 61.21,60.2 J22.1
MISO3
  Top 0.254: U7.16 92.92,47.72 91.36,49.28 91.36,54.28 87.12,58.52 87.12,60.2 J32.1
MISO4
  Top 0.254: U9.16 118.83,47.72 117.27,49.28 117.27,54.28 113.03,58.52 113.03,60.2 J42.1
MOSI
  Top 0.254: U1.15 16,47.76 14.27,49.48 14.27,55.32 J2.4
MOSI1
  Top 0.254: U3.15 41.9,47.76 40.18,49.48 40.18,55.32 J12.4
MOSI2
  Top 0.254: U5.15 67.81,47.76 66.09,49.48 66.09,55.32 J22.4
MOSI3
  Top 0.254: U7.15 93.72,47.76 92,49.48 92,55.32 J32.4
MOSI4
  Top 0.254: U9.15 119.63,47.76 117.91,49.48 117.91,55.32 J42.4
N$1
  Top 0.203: Q1.1 23.66,45.89 23.37,45.59 23.37,45.19 23.14,44.96 U1.8
N$2
  Top 0.203: Q1.3 23.54,43.49 23.32,43.71 23.32,43.97 23.11,44.17 22.3,44.17 U1.7
N$3
  Top 0.254: R3.2 33.89,75.35 D3.A
N$4
  Top 0.254: Q3.1 18.92,75.11 19.2,75.38 R4.2
N$5  (via drill 0.38)
  Top 0.254: Q2.1 21.98,67.94 R5.1 23.07,69.45 v23.09,69.47 | v22.05,72.26 21.05,72.26 Q3.3
  Bottom 0.254: v23.09,69.47 22.05,70.51 v22.05,72.26
N$6
  Top 0.762: Q2.3 22.07,65.68 22.94,64.82 22.94,61.47 | J10.2 22.1,53.85 22.94,54.69 22.94,61.47 | J10.5 22.94,61.47
N$7
  Top 0.254: R6.2 7.99,75.35 D2.A
N$8
  Top 0.203: Q4.1 49.57,45.89 49.28,45.59 49.28,45.19 49.05,44.96 U3.8
N$9
  Top 0.203: Q4.3 49.45,43.49 49.22,43.71 49.22,43.97 49.02,44.17 48.21,44.17 U3.7
N$10
  Top 0.254: R7.2 17.25,75.46 D1.A
N$11
  Top 0.762: Q5.3 47.98,65.68 48.84,64.82 48.84,61.47 | J20.2 48.01,53.85 48.84,54.69 48.84,61.47 | J20.5 48.84,61.47
N$12
  Top 0.254: R8.2 43.15,75.46 D4.A
N$13
  Top 0.254: Q6.1 44.83,75.11 45.1,75.38 R9.2
N$14  (via drill 0.38)
  Top 0.254: Q5.1 47.89,67.94 R10.1 48.98,69.45 v49,69.47 | v47.95,72.26 46.96,72.26 Q6.3
  Bottom 0.254: v49,69.47 47.95,70.51 v47.95,72.26
N$15
  Top 0.254: R12.2 59.8,75.35 D5.A
N$16
  Top 0.203: Q7.1 75.48,45.89 75.18,45.59 75.18,45.19 74.95,44.96 U5.8
N$17
  Top 0.203: Q7.3 75.36,43.49 75.13,43.71 75.13,43.97 74.93,44.17 74.12,44.17 U5.7
N$18
  Top 0.762: Q8.3 73.89,65.68 74.75,64.82 74.75,61.47 | J30.2 73.91,53.85 74.75,54.69 74.75,61.47 | J30.5 74.75,61.47
N$19
  Top 0.254: R13.2 69.06,75.46 D6.A
N$20
  Top 0.254: Q9.1 70.74,75.11 71.01,75.38 R14.2
N$21  (via drill 0.38)
  Top 0.254: Q8.1 73.8,67.94 R15.1 74.89,69.45 v74.91,69.47 | v73.86,72.26 72.87,72.26 Q9.3
  Bottom 0.254: v74.91,69.47 73.86,70.51 v73.86,72.26
N$22
  Top 0.254: R17.2 85.71,75.35 D7.A
N$23
  Top 0.203: Q10.1 101.39,45.89 101.09,45.59 101.09,45.19 100.86,44.96 U7.8
N$24
  Top 0.203: Q10.3 101.27,43.49 101.04,43.71 101.04,43.97 100.84,44.17 100.02,44.17 U7.7
N$25
  Top 0.762: Q11.3 99.8,65.68 100.66,64.82 100.66,61.47 | J40.2 99.82,53.85 100.66,54.69 100.66,61.47 | J40.5 100.66,61.47
N$26
  Top 0.254: R18.2 94.97,75.46 D8.A
N$27
  Top 0.254: Q12.1 96.65,75.11 96.92,75.38 R19.2
N$28  (via drill 0.38)
  Top 0.254: Q11.1 99.7,67.94 R20.1 100.8,69.45 v100.81,69.47 | v99.77,72.26 98.78,72.26 Q12.3
  Bottom 0.254: v100.81,69.47 99.77,70.51 v99.77,72.26
N$29
  Top 0.254: R22.2 111.62,75.35 D9.A
N$30
  Top 0.203: Q13.1 127.3,45.89 127,45.59 127,45.19 126.77,44.96 U9.8
N$31
  Top 0.203: Q13.3 127.17,43.49 126.95,43.71 126.95,43.97 126.75,44.17 125.93,44.17 U9.7
N$32
  Top 0.762: Q14.3 125.7,65.68 126.57,64.82 126.57,61.47 | J50.2 125.73,53.85 126.57,54.69 126.57,61.47 | J50.5 126.57,61.47
N$33
  Top 0.254: R23.2 120.88,75.46 D10.A
N$34
  Top 0.254: Q15.1 122.56,75.11 122.83,75.38 R24.2
N$35  (via drill 0.38)
  Top 0.254: Q14.1 125.61,67.94 R25.1 126.7,69.45 v126.72,69.47 | v125.68,72.26 124.69,72.26 Q15.3
  Bottom 0.254: v126.72,69.47 125.68,70.51 v125.68,72.26
NO  (via drill 0.38)
  Top 0.254: S5.1 26.54,22.73 28.45,20.83 J8.1 | U1.27 16.8,36.24 v16.97,36.07
  Bottom 0.254: v16.97,36.07 16.97,31.04 27.18,20.83 J8.1
NO1  (via drill 0.38)
  Top 0.254: S11.1 52.45,22.73 54.36,20.83 J18.1 | U3.27 42.7,36.24 v42.88,36.07
  Bottom 0.254: v42.88,36.07 42.88,31.04 53.09,20.83 J18.1
NO2  (via drill 0.38)
  Top 0.254: S17.1 78.36,22.73 80.26,20.83 J28.1 | U5.27 68.61,36.24 v68.78,36.07
  Bottom 0.254: v68.78,36.07 68.78,31.04 78.99,20.83 J28.1
NO3  (via drill 0.38)
  Top 0.254: S23.1 104.27,22.73 106.17,20.83 J38.1 | U7.27 94.52,36.24 v94.69,36.07
  Bottom 0.254: v94.69,36.07 94.69,31.04 104.9,20.83 J38.1
NO4  (via drill 0.38)
  Top 0.254: S29.1 130.17,22.73 132.08,20.83 J48.1 | U9.27 120.43,36.24 v120.6,36.07
  Bottom 0.254: v120.6,36.07 120.6,31.04 130.81,20.83 J48.1
PLAY  (via drill 0.38)
  Top 0.254: S2.1 12.57,18.92 10.67,20.83 J5.1 | U1.24 12.77,39.36 12.65,39.24 12.65,38.15 v13.16,37.64
  Bottom 0.254: v13.16,37.64 13.16,22.05 11.94,20.83 J5.1
PLAY1  (via drill 0.38)
  Top 0.254: S8.1 38.48,18.92 36.58,20.83 J15.1 | U3.24 38.67,39.36 38.56,39.24 38.56,38.15 v39.06,37.64
  Bottom 0.254: v39.06,37.64 39.06,22.05 37.85,20.83 J15.1
PLAY2  (via drill 0.38)
  Top 0.254: S14.1 64.39,18.92 62.48,20.83 J25.1 | U5.24 64.58,39.36 64.47,39.24 64.47,38.15 v64.97,37.64
  Bottom 0.254: v64.97,37.64 64.97,22.05 63.75,20.83 J25.1
PLAY3  (via drill 0.38)
  Top 0.254: S20.1 90.3,18.92 88.39,20.83 J35.1 | U7.24 90.49,39.36 90.37,39.24 90.37,38.15 v90.88,37.64
  Bottom 0.254: v90.88,37.64 90.88,22.05 89.66,20.83 J35.1
PLAY4  (via drill 0.38)
  Top 0.254: S26.1 116.2,18.92 114.3,20.83 J45.1 | U9.24 116.4,39.36 116.28,39.24 116.28,38.15 v116.79,37.64
  Bottom 0.254: v116.79,37.64 116.79,22.05 115.57,20.83 J45.1
REC  (via drill 0.38)
  Top 0.254: S1.1 12.57,29.08 10.67,30.99 J4.1 | U1.23 12.57,40.16 12.09,39.67 12.09,37.64 v12.12,37.62
  Bottom 0.254: v12.12,37.62 12.12,33.71 9.4,30.99 J4.1
REC1  (via drill 0.38)
  Top 0.254: S7.1 38.48,29.08 36.58,30.99 J14.1 | U3.23 38.48,40.16 38,39.67 38,37.64 v38.02,37.62
  Bottom 0.254: v38.02,37.62 38.02,33.71 35.31,30.99 J14.1
REC2  (via drill 0.38)
  Top 0.254: S13.1 64.39,29.08 62.48,30.99 J24.1 | U5.23 64.39,40.16 63.91,39.67 63.91,37.64 v63.93,37.62
  Bottom 0.254: v63.93,37.62 63.93,33.71 61.21,30.99 J24.1
REC3  (via drill 0.38)
  Top 0.254: S19.1 90.3,29.08 88.39,30.99 J34.1 | U7.23 90.3,40.16 89.81,39.67 89.81,37.64 v89.84,37.62
  Bottom 0.254: v89.84,37.62 89.84,33.71 87.12,30.99 J34.1
REC4  (via drill 0.38)
  Top 0.254: S25.1 116.2,29.08 114.3,30.99 J44.1 | U9.23 116.21,40.16 115.72,39.67 115.72,37.64 v115.75,37.62
  Bottom 0.254: v115.75,37.62 115.75,33.71 113.03,30.99 J44.1
RST  (via drill 0.38)
  Top 0.254: U1.29 v18.4,39.19 v18.39,39.19 18.39,41.48 v17.86,42.01 | v8.2,35.89 8.2,37.06 C2.1 8.31,37.16 R2.1
  Bottom 0.254: v18.39,39.19 11.51,39.19 v8.2,35.89 | J2.5 15.75,58.93 15.75,44.12 v17.86,42.01
RST1  (via drill 0.38)
  Top 0.254: U3.29 v44.3,39.19 44.3,41.48 v43.76,42.01 | v34.11,35.89 34.11,37.06 C5.1 34.21,37.16 R1.1
  Bottom 0.254: v44.3,39.19 37.41,39.19 v34.11,35.89 | J12.5 41.66,58.93 41.66,44.12 v43.76,42.01
RST2  (via drill 0.38)
  Top 0.254: U5.29 v70.21,39.19 70.21,41.48 v69.67,42.01 | v60.02,35.89 60.02,37.06 C10.1 60.12,37.16 R11.1
  Bottom 0.254: v70.21,39.19 63.32,39.19 v60.02,35.89 | J22.5 67.56,58.93 67.56,44.12 v69.67,42.01
RST3  (via drill 0.38)
  Top 0.254: U7.29 v96.12,39.19 v96.11,39.19 96.11,41.48 v95.58,42.01 | v85.93,35.89 85.93,37.06 C14.1 86.03,37.16 R16.1
  Bottom 0.254: v96.11,39.19 89.23,39.19 v85.93,35.89 | J32.5 93.47,58.93 93.47,44.12 v95.58,42.01
RST4  (via drill 0.38)
  Top 0.254: U9.29 v122.03,39.19 v122.02,39.19 122.02,41.48 v121.49,42.01 | v111.84,35.89 111.84,37.06 C18.1 111.94,37.16 R21.1
  Bottom 0.254: v122.02,39.19 115.14,39.19 v111.84,35.89 | J42.5 119.38,58.93 119.38,44.12 v121.49,42.01
RX  (via drill 0.38)
  Top 0.254: U1.30 19.2,40.62 v19.18,40.64
  Bottom 0.254: v19.18,40.64 18.95,40.41 13.95,40.41 J1.P$3
RX1  (via drill 0.38)
  Top 0.254: U3.30 45.1,40.62 v45.08,40.64
  Bottom 0.254: v45.08,40.64 44.86,40.41 39.85,40.41 J11.P$3
RX2  (via drill 0.38)
  Top 0.254: U5.30 71.01,40.62 v70.99,40.64
  Bottom 0.254: v70.99,40.64 70.76,40.41 65.76,40.41 J21.P$3
RX3  (via drill 0.38)
  Top 0.254: U7.30 96.92,40.62 v96.9,40.64
  Bottom 0.254: v96.9,40.64 96.67,40.41 91.67,40.41 J31.P$3
RX4  (via drill 0.38)
  Top 0.254: U9.30 122.83,40.62 v122.81,40.64
  Bottom 0.254: v122.81,40.64 122.58,40.41 117.58,40.41 J41.P$3
SCK  (via drill 0.38)
  Top 0.254: U1.17 12.7,44.96 11.94,45.72 v11.94,53.85 | v9.17,71.4 8,71.4 R6.1
  Bottom 0.254: v9.17,71.4 11.94,68.63 11.94,61.47 | v11.94,53.85 11.94,61.47 | J2.3 11.94,61.47
SCK1  (via drill 0.38)
  Top 0.254: U3.17 38.61,44.96 37.85,45.72 v37.85,53.85 | v35.08,71.4 R3.1
  Bottom 0.254: v35.08,71.4 37.85,68.63 37.85,61.47 | v37.85,53.85 37.85,61.47 | J12.3 37.85,61.47
SCK2  (via drill 0.38)
  Top 0.254: U5.17 64.52,44.96 63.75,45.72 v63.75,53.85 | v60.98,71.4 59.81,71.4 R12.1
  Bottom 0.254: v60.98,71.4 63.75,68.63 63.75,61.47 | v63.75,53.85 63.75,61.47 | J22.3 63.75,61.47
SCK3  (via drill 0.38)
  Top 0.254: U7.17 90.42,44.96 89.66,45.72 v89.66,53.85 | v86.89,71.4 85.72,71.4 R17.1
  Bottom 0.254: v86.89,71.4 89.66,68.63 89.66,61.47 | v89.66,53.85 89.66,61.47 | J32.3 89.66,61.47
SCK4  (via drill 0.38)
  Top 0.254: U9.17 116.33,44.96 115.57,45.72 v115.57,53.85 | v112.8,71.4 111.63,71.4 R22.1
  Bottom 0.254: v112.8,71.4 115.57,68.63 115.57,61.47 | v115.57,53.85 115.57,61.47 | J42.3 115.57,61.47
SERVO_1  (via drill 0.38)
  Top 0.254: U1.13 17.6,47.83 15.47,49.96 15.47,63.09 v15.67,63.3 | v19.58,62.84 19.58,63.95 J10.6
  Bottom 0.254: v15.67,63.3 16.13,62.84 v19.58,62.84
SERVO_2
  Top 0.254: U1.10 20,48.02 19.61,48.41 18.49,48.41 16.82,50.09 16.82,55.68 17.53,56.39 J10.3
SERVO_3  (via drill 0.38)
  Top 0.254: U3.13 43.5,47.83 41.38,49.96 41.38,63.09 v41.58,63.3 | v45.49,62.84 45.49,63.95 J20.6
  Bottom 0.254: v41.58,63.3 42.04,62.84 v45.49,62.84
SERVO_4
  Top 0.254: U3.10 45.9,48.02 45.52,48.41 44.4,48.41 42.72,50.09 42.72,55.68 43.43,56.39 J20.3
SERVO_5  (via drill 0.38)
  Top 0.254: U5.13 69.41,47.83 67.28,49.96 67.28,63.09 v67.49,63.3 | v71.4,62.84 71.4,63.95 J30.6
  Bottom 0.254: v67.49,63.3 67.95,62.84 v71.4,62.84
SERVO_6
  Top 0.254: U5.10 71.81,48.02 71.42,48.41 70.31,48.41 68.63,50.09 68.63,55.68 69.34,56.39 J30.3
SERVO_7  (via drill 0.38)
  Top 0.254: U7.13 95.32,47.83 93.19,49.96 93.19,63.09 v93.4,63.3 | v97.31,62.84 97.31,63.95 J40.6
  Bottom 0.254: v93.4,63.3 93.85,62.84 v97.31,62.84
SERVO_8
  Top 0.254: U7.10 97.72,48.02 97.33,48.41 96.22,48.41 94.54,50.09 94.54,55.68 95.25,56.39 J40.3
SERVO_9  (via drill 0.38)
  Top 0.254: U9.13 121.23,47.83 119.1,49.96 119.1,63.09 v119.3,63.3 | v123.22,62.84 123.22,63.95 J50.6
  Bottom 0.254: v119.3,63.3 119.76,62.84 v123.22,62.84
SERVO_10
  Top 0.254: U9.10 123.63,48.02 123.24,48.41 122.12,48.41 120.45,50.09 120.45,55.68 121.16,56.39 J50.3
SNAKE  (via drill 0.38)
  Top 0.254: S6.1 26.54,12.57 28.45,10.67 J9.1 | U1.26 16,36.27 v15.93,36.2
  Bottom 0.254: v15.93,36.2 15.93,21.92 27.18,10.67 J9.1
SNAKE1  (via drill 0.38)
  Top 0.254: S12.1 52.45,12.57 54.36,10.67 J19.1 | U3.26 41.9,36.27 v41.83,36.2
  Bottom 0.254: v41.83,36.2 41.83,21.92 53.09,10.67 J19.1
SNAKE2  (via drill 0.38)
  Top 0.254: S18.1 78.36,12.57 80.26,10.67 J29.1 | U5.26 67.81,36.27 v67.74,36.2
  Bottom 0.254: v67.74,36.2 67.74,21.92 78.99,10.67 J29.1
SNAKE3  (via drill 0.38)
  Top 0.254: S24.1 104.27,12.57 106.17,10.67 J39.1 | U7.26 93.72,36.27 v93.65,36.2
  Bottom 0.254: v93.65,36.2 93.65,21.92 104.9,10.67 J39.1
SNAKE4  (via drill 0.38)
  Top 0.254: S30.1 130.17,12.57 132.08,10.67 J49.1 | U9.26 119.63,36.27 v119.56,36.2
  Bottom 0.254: v119.56,36.2 119.56,21.92 130.81,10.67 J49.1
TRCK_SEL  (via drill 0.38)
  Top 0.254: S3.1 12.57,8.76 10.67,10.67 J6.1 | U1.25 15.2,36.79 v14.88,36.47
  Bottom 0.254: v14.88,36.47 14.88,13.61 11.94,10.67 J6.1
TRCK_SEL1  (via drill 0.38)
  Top 0.254: S9.1 38.48,8.76 36.58,10.67 J16.1 | U3.25 41.1,36.79 v40.79,36.47
  Bottom 0.254: v40.79,36.47 40.79,13.61 37.85,10.67 J16.1
TRCK_SEL2  (via drill 0.38)
  Top 0.254: S15.1 64.39,8.76 62.48,10.67 J26.1 | U5.25 67.01,36.79 v66.7,36.47
  Bottom 0.254: v66.7,36.47 66.7,13.61 63.75,10.67 J26.1
TRCK_SEL3  (via drill 0.38)
  Top 0.254: S21.1 90.3,8.76 88.39,10.67 J36.1 | U7.25 92.92,36.79 v92.61,36.47
  Bottom 0.254: v92.61,36.47 92.61,13.61 89.66,10.67 J36.1
TRCK_SEL4  (via drill 0.38)
  Top 0.254: S27.1 116.2,8.76 114.3,10.67 J46.1 | U9.25 118.83,36.79 v118.52,36.47
  Bottom 0.254: v118.52,36.47 118.52,13.61 115.57,10.67 J46.1
TX  (via drill 0.38)
  Top 0.254: U1.31 20,39.63 v20.02,39.65
  Bottom 0.254: v20.02,39.65 19.76,39.9 11.91,39.9 J1.P$2
TX1  (via drill 0.38)
  Top 0.254: U3.31 45.9,39.63 v45.92,39.65
  Bottom 0.254: v45.92,39.65 45.67,39.9 37.82,39.9 J11.P$2
TX2  (via drill 0.38)
  Top 0.254: U5.31 71.81,39.63 v71.83,39.65
  Bottom 0.254: v71.83,39.65 71.58,39.9 63.73,39.9 J21.P$2
TX3  (via drill 0.38)
  Top 0.254: U7.31 97.72,39.63 v97.74,39.65
  Bottom 0.254: v97.74,39.65 97.48,39.9 89.64,39.9 J31.P$2
TX4  (via drill 0.38)
  Top 0.254: U9.31 123.63,39.63 v123.65,39.65
  Bottom 0.254: v123.65,39.65 123.39,39.9 115.55,39.9 J41.P$2
VBAT  (via drill 0.38)
  Top 0.406: U2.1 30.89,45.17 C1.+ 29.46,45.51 28.99,45.04 U2.3
  Top 0.762: Q2.2 20.23,69.4 R5.2 20.27,69.46 20.27,70.54 20.85,71.12 J3.2 v29.56,71.12 v29.57,71.12 | C1.+ 30.55,47.1 v30.53,47.12
  Bottom 0.762: v29.57,71.12 29.57,48.08 v30.53,47.12
VBAT1  (via drill 0.38)
  Top 0.406: U4.1 56.8,45.17 C7.+ 55.36,45.51 54.9,45.04 U4.3
  Top 0.762: Q5.2 46.14,69.4 R10.2 46.18,69.46 46.18,70.54 46.76,71.12 J13.2 v55.47,71.12 | C7.+ 56.45,47.1 v56.44,47.12
  Bottom 0.762: v55.47,71.12 55.47,48.08 v56.44,47.12
VBAT2  (via drill 0.38)
  Top 0.406: U6.1 82.7,45.17 C12.+ 81.27,45.51 80.81,45.04 U6.3
  Top 0.762: Q8.2 72.05,69.4 R15.2 72.09,69.46 72.09,70.54 72.67,71.12 J23.2 v81.38,71.12 | C12.+ 82.36,47.1 v82.35,47.12
  Bottom 0.762: v81.38,71.12 81.38,48.08 v82.35,47.12
VBAT3  (via drill 0.38)
  Top 0.406: U8.1 108.61,45.17 C16.+ 107.18,45.51 106.71,45.04 U8.3
  Top 0.762: Q11.2 97.95,69.4 R20.2 97.99,69.46 97.99,70.54 98.58,71.12 J33.2 v107.29,71.12 | C16.+ 108.27,47.1 v108.26,47.12
  Bottom 0.762: v107.29,71.12 107.29,48.08 v108.26,47.12
VBAT4  (via drill 0.38)
  Top 0.406: U10.1 134.52,45.17 C20.+ 133.09,45.51 132.62,45.04 U10.3
  Top 0.762: Q14.2 123.86,69.4 R25.2 123.9,69.46 123.9,70.54 124.48,71.12 J43.2 v133.2,71.12 | C20.+ 134.18,47.1 v134.16,47.12
  Bottom 0.762: v133.2,71.12 133.2,48.08 v134.16,47.12
VCC
  Top 0.406: U2.5 30.89,39.55 30.81,39.47 28.6,39.47 28.04,40.03 27.36,40.03 26.91,40.48 C9.+ 26.59,41.76 24.93,41.76 | C3.2 24.93,41.76 | 24.93,41.76 U1.4 20.93,41.76 20.57,42.11 20.57,43.36 U1.6 20.57,43.36 19.77,44.16 15.67,44.16 | U1.18 15.67,44.16 | 15.67,44.16 15.7,44.13 15.7,43.36 15.7,43 15.25,42.56 U1.20 11.94,42.56 11.65,42.56 10.31,42.56 10.3,42.57 | R2.2 10.3,42.57 | 10.3,42.57 10.3,48.77 | 10.3,48.77 10.3,56.75 J2.2 | J1.P$4 10.3,48.77
VCC1
  Top 0.406: U4.5 56.8,39.55 56.72,39.47 54.51,39.47 53.95,40.03 53.26,40.03 52.81,40.48 C6.+ 52.49,41.76 50.84,41.76 | C4.2 50.84,41.76 | 50.84,41.76 U3.4 46.84,41.76 46.48,42.11 46.48,43.36 U3.6 46.48,43.36 45.68,44.16 41.58,44.16 | U3.18 41.58,44.16 | 41.58,44.16 41.61,44.13 41.61,43.36 41.6,43.36 41.6,43 41.16,42.56 U3.20 37.85,42.56 37.55,42.56 36.22,42.56 36.21,42.57 | R1.2 36.21,42.57 | 36.21,42.57 36.21,48.77 | 36.21,48.77 36.21,56.75 J12.2 | J11.P$4 36.21,48.77
VCC2
  Top 0.406: U6.5 82.7,39.55 82.63,39.47 80.42,39.47 79.86,40.03 79.17,40.03 78.72,40.48 C11.+ 78.4,41.76 76.75,41.76 | C8.2 76.75,41.76 | 76.75,41.76 U5.4 72.74,41.76 72.39,42.11 72.39,43.36 U5.6 72.39,43.36 71.59,44.16 67.49,44.16 | U5.18 67.49,44.16 | 67.49,44.16 67.52,44.13 67.52,43.36 67.51,43.36 67.51,43 67.07,42.56 U5.20 63.75,42.56 63.46,42.56 62.13,42.56 62.12,42.57 | R11.2 62.12,42.57 | 62.12,42.57 62.12,48.77 | 62.12,48.77 62.12,56.75 J22.2 | J21.P$4 62.12,48.77
VCC3
  Top 0.406: U8.5 108.61,39.55 108.53,39.47 106.32,39.47 105.77,40.03 105.08,40.03 104.63,40.48 C15.+ 104.31,41.76 102.66,41.76 | C13.2 102.66,41.76 | 102.66,41.76 U7.4 98.65,41.76 98.3,42.11 98.3,43.36 U7.6 98.3,43.36 97.5,44.16 93.4,44.16 | U7.18 93.4,44.16 | 93.4,44.16 93.42,44.13 93.42,43.36 93.42,43 92.98,42.56 U7.20 89.66,42.56 89.37,42.56 88.04,42.56 88.03,42.57 | R16.2 88.03,42.57 | 88.03,42.57 88.03,48.77 | 88.03,48.77 88.03,56.75 J32.2 | J31.P$4 88.03,48.77
VCC4
  Top 0.406: U10.5 134.52,39.55 134.44,39.47 132.23,39.47 131.67,40.03 130.99,40.03 130.54,40.48 C19.+ 130.22,41.76 128.56,41.76 | C17.2 128.56,41.76 | 128.56,41.76 U9.4 124.56,41.76 124.21,42.11 124.21,43.36 U9.6 124.2,43.36 123.41,44.16 119.3,44.16 | U9.18 119.3,44.16 | 119.3,44.16 119.33,44.13 119.33,43.36 119.33,43 118.89,42.56 U9.20 115.57,42.56 115.28,42.56 113.95,42.56 113.93,42.57 | R21.2 113.93,42.57 | 113.93,42.57 113.93,48.77 | 113.93,48.77 113.93,56.75 J42.2 | J41.P$4 113.93,48.77
YES  (via drill 0.38)
  Top 0.254: S4.1 26.54,32.89 28.45,30.99 J7.1 | U1.28 17.6,36.53 v18.03,36.09
  Bottom 0.254: v18.03,36.09 23.14,30.99 J7.1
YES1  (via drill 0.38)
  Top 0.254: S10.1 52.45,32.89 54.36,30.99 J17.1 | U3.28 43.5,36.53 v43.94,36.09
  Bottom 0.254: v43.94,36.09 49.05,30.99 J17.1
YES2  (via drill 0.38)
  Top 0.254: S16.1 78.36,32.89 80.26,30.99 J27.1 | U5.28 69.41,36.53 v69.85,36.09
  Bottom 0.254: v69.85,36.09 74.95,30.99 J27.1
YES3  (via drill 0.38)
  Top 0.254: S22.1 104.27,32.89 106.17,30.99 J37.1 | U7.28 95.32,36.53 v95.76,36.09
  Bottom 0.254: v95.76,36.09 100.86,30.99 J37.1
YES4  (via drill 0.38)
  Top 0.254: S28.1 130.17,32.89 132.08,30.99 J47.1 | U9.28 121.23,36.53 v121.67,36.09
  Bottom 0.254: v121.67,36.09 126.77,30.99 J47.1

## Text on the board
Bottom: v20 | v20 | v20 | v20 | v20
Milling: v-score | v-score | v-score | v-score | v-score | v-score | v-score | v-score